# Altium PCB BatteryChargerModule16S.PcbDoc
Units mil, origin at the board's own origin, x right, y up, seen from the top; angles counter-clockwise.
Board outline 6000 x 4000 mil, 2 copper layers (Top Layer, Bottom Layer); 1 components, 0 nets, 48 pads, 0 vias.
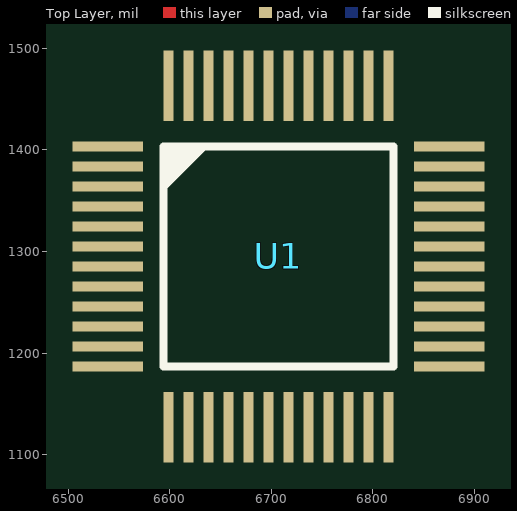
[diagram p0: Top Layer view]
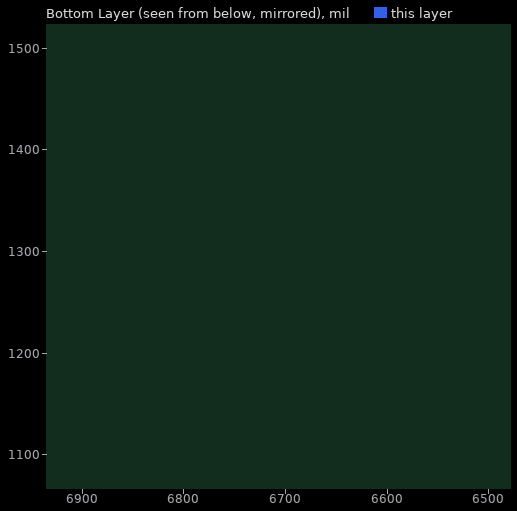
[diagram p1: Bottom Layer view, seen from below]

## Layer stack, top to bottom
Top Solder: solder mask 0.4, Solder Resist, Dk 3.5
Top Layer: signal copper 1.4
Dielectric 1: dielectric 12.6, FR-4, Dk 4.8
Bottom Layer: signal copper 1.4
Bottom Solder: solder mask 0.4, Solder Resist, Dk 3.5

## Board outline
1000,1000 7000,1000 7000,5000 1000,5000

## Design rules (kind name [scope] priority, off if disabled: settings)
Clearance [All] p1: gap=10 ignorepadtopadclearanceinfootprint=FALSE
PolygonConnect [All] p1: connectstyle=Relief reliefconductorwidth=10 reliefentries=4 polygonreliefangle="90 Angle" airgapwidth=10
RoutingVias [All] p1: holewidth=28 width=50 viastyle="Through Hole" minholewidth=28 minwidth=50 maxholewidth=28 maxwidth=50
SolderMaskExpansion [All] p1: expansion=4 istentingtop=FALSE
Width [All] p1: maxlimit=10 minlimit=10 preferedwidth=10
30 further rules are at their usual default settings.

## Components (designator, comment, footprint, x,y, rotation, side; value= is the part's Value field where it differs from the comment)
U1 "MP2797DFP" MP2797DFP 6712.03,1285.16 r0 top

## Footprints (in the part's own frame and the unit in brackets; to place one, negate y for a bottom-side part, rotate by r counter-clockwise, add the part's x,y. Pads: shape width x height; smd on the part's side, far side on the other; paste and mask are expansions set on the pad)
MP2797DFP [mil]
  rect 69.37x10 smd paste+0 mask+0: 1(-172.97,118.27) 2(-172.97,98.58) 3(-172.97,78.9) 4(-172.97,59.21) 5(-172.97,39.53) 6(-172.97,19.84) 7(-172.97,0.16) 8(-172.97,-19.53) 9(-172.97,-39.21) 10(-172.97,-58.9) 11(-172.97,-78.58) 12(-172.97,-98.27) 25(162.97,-98.27) 26(162.97,-78.58) 27(162.97,-58.9) 28(162.97,-39.21) 29(162.97,-19.53) 30(162.97,0.16) 31(162.97,19.84) 32(162.97,39.53) 33(162.97,59.21) 34(162.97,78.9) 35(162.97,98.58) 36(162.97,118.27)
  rect 10x69.37 smd paste+0 mask+0: 13(-113.27,-157.97) 14(-93.58,-157.97) 15(-73.9,-157.97) 16(-54.21,-157.97) 17(-34.53,-157.97) 18(-14.84,-157.97) 19(4.84,-157.97) 20(24.53,-157.97) 21(44.21,-157.97) 22(63.9,-157.97) 23(83.58,-157.97) 24(103.27,-157.97) 37(103.27,177.97) 38(83.58,177.97) 39(63.9,177.97) 40(44.21,177.97) 41(24.53,177.97) 42(4.84,177.97) 43(-14.84,177.97) 44(-34.53,177.97) 45(-54.21,177.97) 46(-73.9,177.97) 47(-93.58,177.97) 48(-113.27,177.97)
  silkscreen extent -118,-98 108,118, body extent -186,-171 176,191, height 47

## Part data
U1: "7S - 16S, Battery Monitor and Protector with Coulomb Counting", Manufacturer 1="Monolithic Power Systems Inc."

## Nets (pads, with @x,y where several pads share a name; then routed paths per layer and width w, separated by ;. In a path a pad name is that pad's centre, name@x,y a point inside that pad or via, vN(x,y) a via of type N, cw(c..) or ccw(c..) an arc to the next point about the centre after c; other vN are vias at no path point)
pads on no net: U1.1 U1.2 U1.3 U1.4 U1.5 U1.6 U1.7 U1.8 U1.9 U1.10 U1.11 U1.12 U1.13 U1.14 U1.15 U1.16 U1.17 U1.18 U1.19 U1.20 U1.21 U1.22 U1.23 U1.24 U1.25 U1.26 U1.27 U1.28 U1.29 U1.30 U1.31 U1.32 U1.33 U1.34 U1.35 U1.36 U1.37 U1.38 U1.39 U1.40 U1.41 U1.42 U1.43 U1.44 U1.45 U1.46 U1.47 U1.48

## Text inside footprints (layer, text, board x,y; h text height)
U1: Mechanical 13 "*" at 6570.53,1388.27 h50